# Altium PCB Board2.PcbDoc
Units mm, origin at the board's own origin, x right, y up, seen from the top; angles counter-clockwise.
Board outline 100 x 70 mm, 2 copper layers (Top Layer, Bottom Layer); 17 components, 29 nets, 158 pads, 148 vias.
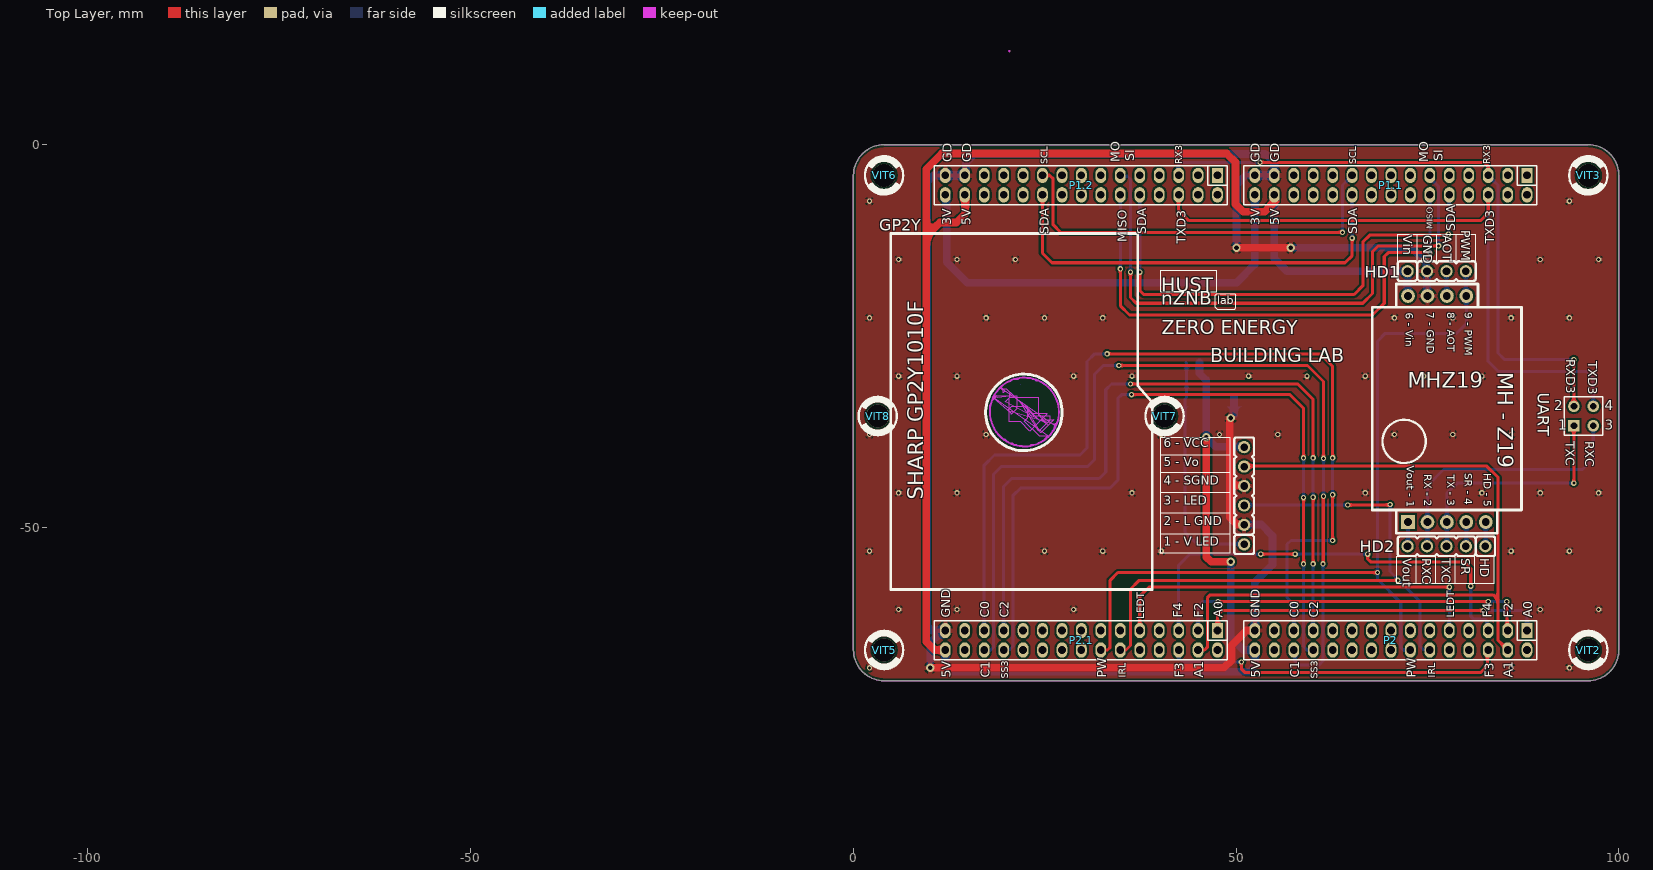
[diagram p0: Top Layer view]
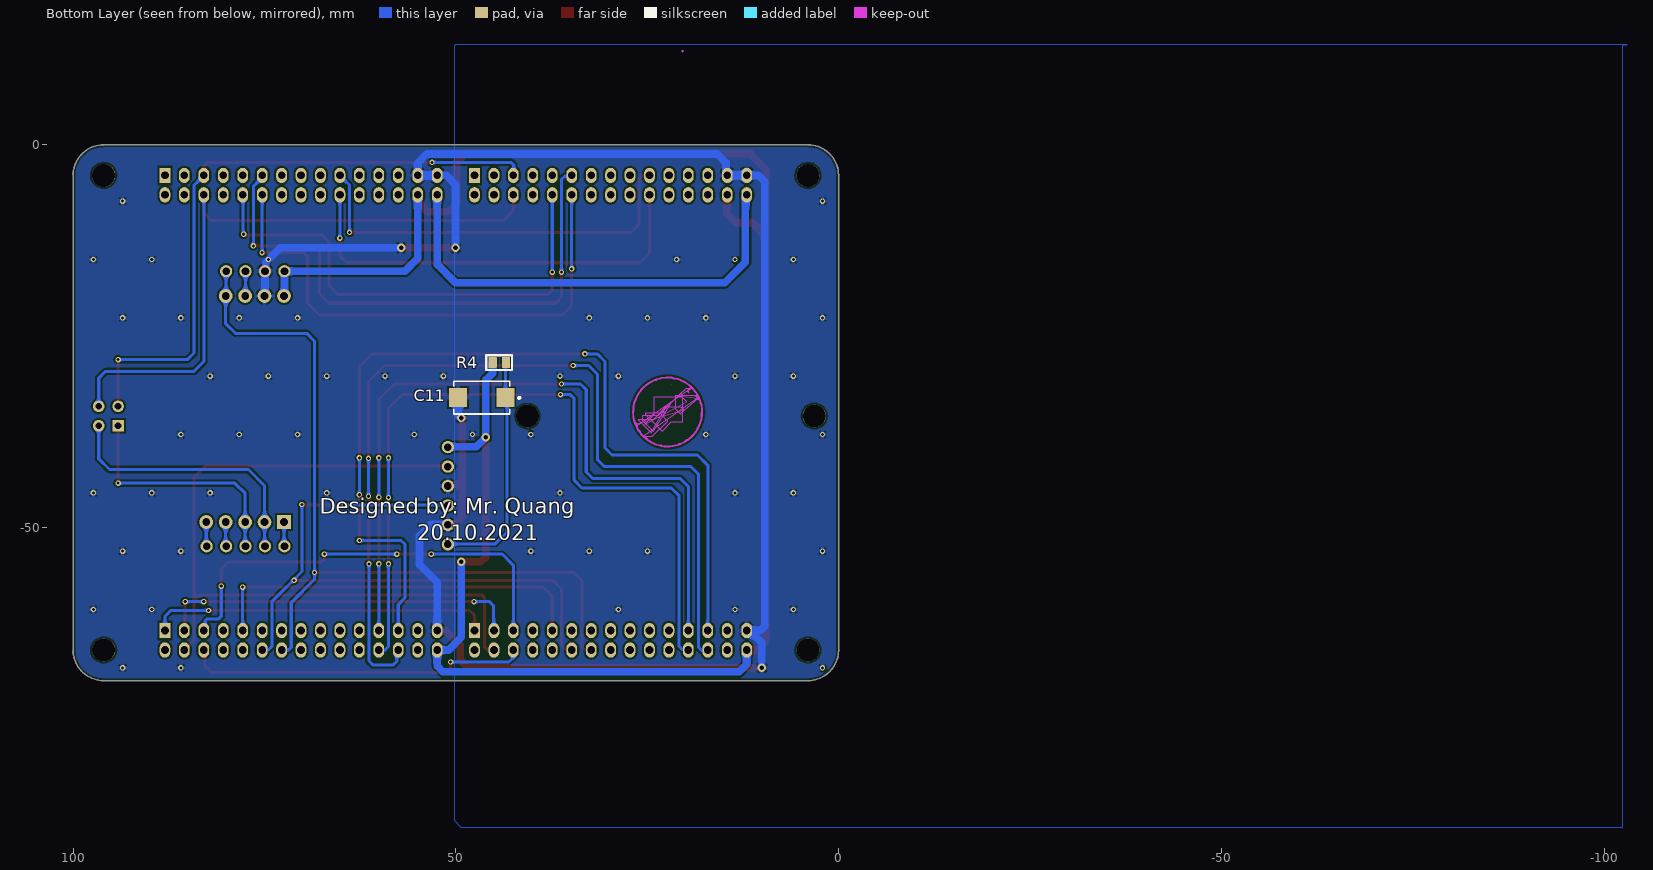
[diagram p1: Bottom Layer view, seen from below]

## Layer stack, top to bottom
Top Solder: solder mask 0.0102, Solder Resist, Dk 3.5
Top Layer: signal copper 0.0356
Dielectric 1: dielectric 0.32, FR-4, Dk 4.8
Bottom Layer: signal copper 0.0356
Bottom Solder: solder mask 0.0102, Solder Resist, Dk 3.5

## Board outline
0,-66 0,-4 cw(c4,-4) 4,0 96,0 cw(c96,-4) 100,-4 100,-66 cw(c96,-66) 96,-70 4,-70 cw(c4,-66)

## Design rules (kind name [scope] priority, off if disabled: settings)
Clearance [All] p1: gap=0.254 ignorepadtopadclearanceinfootprint=FALSE
PlaneConnect [All] p1: planeconnectstyle=Relief reliefexpansion=0.508 reliefentries=4 reliefconductorwidth=0.6 reliefairgap=0.4
PolygonConnect [All] p1: connectstyle=Relief reliefconductorwidth=0.6 reliefentries=4 polygonreliefangle="90 Angle" airgapwidth=0.254
RoutingVias RoutingVias_power [InNetClass('Power_class')] p1: holewidth=0.6 width=1.1 viastyle="Through Hole" minholewidth=0.6 minwidth=1.1 maxholewidth=0.6 maxwidth=1.1
RoutingVias RoutingVias_signal [All] p2: holewidth=0.4 width=0.7 viastyle="Through Hole" minholewidth=0.4 minwidth=0.7 maxholewidth=0.4 maxwidth=0.7
SolderMaskExpansion [All] p1: expansion=0.102
UnRoutedNet [All] p1: checkbadconnections=TRUE
Width Width_Power [InNetClass('Power_class')] p1: maxlimit=2 minlimit=1 preferedwidth=1
Width Width_Signal [All] p2: maxlimit=0.4 minlimit=0.4 preferedwidth=0.4
28 further rules are at their usual default settings.

## Classes and differential pairs
net class Power_class: 3.3V 5V GND
component class BOARD2: C11 GP2Y HD1 HD2 MHZ19 P1.1 P1.2 P2.1 R4 UART VIT2 VIT3 VIT5 VIT6 VIT7 VIT8

## Components (designator, comment, footprint, x,y, rotation, side; value= is the part's Value field where it differs from the comment)
C11 "220uF/16V" CAPMP7343X430N 46.609,-33.02 r0 bottom value=1000uF/16V
GP2Y "GP2Y1010Au0f" GP2Y1010AU0F 51.038,-52.197 r0 top
HD1 "Header 4" Header_4 76.2,-16.51 r0 top
HD2 "HD5" Header_5 77.47,-52.451 r180 top
MHZ19 "MH-Z19" MH-Z19 72.443,-19.746 r270 top
P1.1 "Header 15X2H" HED15X2H 88,-4 r180 top
P1.2 "Header 15X2H" HED15X2H 47.56,-4 r180 top
P2 "Header 15X2H" HED15X2H 88,-63.46 r180 top
P2.1 "Header 15X2H" HED15X2H 47.56,-63.46 r180 top
R4 "150R" "Res 0805 SMD" 44.323,-28.448 r180 bottom
UART "Jumper 2x2" HDR2X2 94.107,-36.703 r0 top value="JP 2x2" (schematic designator J?)
VIT2 "1" "Screw 3 small" 96,-66 r0 top
VIT3 "1" "Screw 3 small" 96,-4 r0 top
VIT5 "1" "Screw 3 small" 4,-66 r0 top
VIT6 "1" "Screw 3 small" 4,-4 r0 top
VIT7 "1" "Screw 3 small" 40.64,-35.433 r0 top
VIT8 "1" "Screw 3 small" 3.175,-35.433 r0 top

## Footprints (in the part's own frame and the unit in brackets; to place one, negate y for a bottom-side part, rotate by r counter-clockwise, add the part's x,y. Pads: shape width x height; smd on the part's side, far side on the other; paste and mask are expansions set on the pad)
CAPMP7343X430N [mm]
  rect 2.35x2.45 smd: 1(-3.1,0) 2(3.1,0)
  silkscreen extent -5.11,-2.15 3.65,2.15, body extent -3.75,-2.35 3.55,1.95, height 2.2
GP2Y1010AU0F [mm] "dust sensor 2.5 pm"
  round 1.6 hole 1 mask+0.1: 1(0,0) 2(0,2.54) 3(0,5.08) 4(0,7.62) 5(0,10.16) 6(0,12.7)
  Keep-Out Layer circle w0.254: c-28.704,17.288 r4.5
  Keep-Out Layer region: -29.212,20.844
  Keep-Out Layer region: -31.9,20.5 -31.7,20.5 -30.9,21.3 -30.5,21.3 -30.2,21.6 -29.5,21.6 -29.3,21.8 -28.5,21.8 -28.4,21.7 -27.8,21.7 -27.7,21.6 -27.4,21.6 -27.2,21.4 -26.8,21.4 -26.6,21.2 -26.5,21.2 -26.2,20.9 -26,20.9 -25.4,20.3 -25.4,20.3 -25,19.9 -25,19.8 -24.8,19.6 -24.8,19.4 -24.6,19.2 -24.6,19 -24.5,18.9 -24.5,18.7 -24.4,18.6 -24.4,18.5 -24.3,18.4 -24.3,17.384 -24.2,17.284 -24.2,16.4 -24.4,16.2 -24.4,15.9 -24.7,15.6 -24.7,15.5 -24.6,15.6 -24.6,15.4
  Keep-Out Layer region: -24.6,15.4
  Keep-Out Layer region: -24.7,15.8 -24.7,15.6 -24.6,15.5 -24.6,15.3 -24.9,15
  Keep-Out Layer region: -24.65,15.55 -24.7,15.6 -24.7,15.8 -24.6,15.8 -24.55,15.75
  Keep-Out Layer region: -25.5,14.1 -25.7,14.1 -26.5,13.3 -26.9,13.3 -27.2,13 -27.9,13 -28.1,12.8 -28.9,12.8 -29,12.9 -29.6,12.9 -29.7,13 -30,13 -30.2,13.2 -30.6,13.2 -30.8,13.4 -30.9,13.4 -31.2,13.7 -31.4,13.7 -32,14.3 -32,14.3 -32.4,14.7 -32.4,14.8 -32.6,15 -32.6,15.2 -32.8,15.4 -32.8,15.6 -32.9,15.7 -32.9,15.9 -33,16 -33,16.1 -33.1,16.2 -33.1,17.216 -33.2,17.316 -33.2,18.2 -33,18.4 -33,18.7 -32.7,19 -32.7,19.1 -32.8,19 -32.8,19.2
  Keep-Out Layer region: -32.85,18.85 -32.85,19.25 -32.6,19.5 -32.5,19.4 -32.3,19.4
  Keep-Out Layer region: -32.2,20 -32.2,20.2 -31.9,20.5 -31.6,20.2 -31.4,20.2 -31.7,20.5 -32.6,19.6
  Keep-Out Layer region: -32.7,19.1 -32.7,19.5 -31.7,20.5 -31.7,20.4 -31.3,20 -31.2,20 -31.55,20.35 -31.05,20.35 -30.1,19.4
  Keep-Out Layer region: -31.55,20.35 -31.2,20 -31.3,20 -31.5,19.8
  Keep-Out Layer region: -24.7,15.7 -24.75,15.65 -24.75,15.15 -25.1,14.8 -25.1,14.5 -25.2,14.5 -25.6,14.1 -26.7,14.1 -28.7,16.1 -28.25,16.55 -28.25,17.95 -30.45,17.95 -30.9,17.5
  Keep-Out Layer region: -28.6,18.1 -26.8,16.3 -24.9,16.3 -26.6,14.6
  Keep-Out Layer region: -29.2,18.5 -27.5,16.8 -25.4,16.8 -25.4,16.2 -26.8,14.8
  Keep-Out Layer region: -32.7,19.1 -32.4,19.4 -29.7,19.4 -29.7,17.7 -30.4,17 -30.4,17.1
  Keep-Out Layer region: -30.575,19.875 -27.8,17.1 -25.8,17.1 -25.8,17 -28,14.8 -29.2,16 -30.7,16 -30.7,18.8
  Keep-Out Layer region: -31.2,18.6 -30.6,19.2 -26.9,19.2 -26.9,16.9 -25.7,15.7
  silkscreen extent -46.18,-5.89 1.28,40.61, body extent -45.95,-5.69 1.27,40.31, height 18.3
HDR2X2 [mm] "Connector; Header; 2x2 Position"
  rect 1.5x1.5 hole 0.9: 1(0,0)
  round 1.5 hole 0.9: 2(0,2.54) 3(2.54,0) 4(2.54,2.54)
  silkscreen extent -1.27,-1.27 3.81,3.81, body extent -1.27,-1.27 3.81,3.81, height 7
Header_4 [mm] "Connector DIP, 4Pin_2.54mm"
  round 1.6 hole 1 mask+0.1: 1(-3.81,0) 2(-1.27,0) 3(1.27,0) 4(3.81,0)
  silkscreen extent -5.08,-1.28 5.08,1.28, body extent -5.08,-1.27 5.08,1.27, height 10.1
Header_5 [mm] "Connector DIP, 5Pin_2.54mm"
  round 1.6 hole 1 mask+0.1: 1(-5.08,0) 2(-2.54,0) 3(0,0) 4(2.54,0) 5(5.08,0)
  silkscreen extent -6.35,-1.28 6.35,1.28, body extent -6.35,-1.27 6.35,1.27, height 10.1
HED15X2H [mm]
  rect 1.4x2 hole 1: 1(0,0)
  oval 1.4x2 hole 1: 2(0,2.54) 3(2.54,0) 4(2.54,2.54) 5(5.08,0) 6(5.08,2.54) 7(7.62,0) 8(7.62,2.54) 9(10.16,0) 10(10.16,2.54) 11(12.7,0) 12(12.7,2.54) 13(15.24,0) 14(15.24,2.54) 15(17.78,0) 16(17.78,2.54) 17(20.32,0) 18(20.32,2.54) 19(22.86,0) 20(22.86,2.54) 21(25.4,0) 22(25.4,2.54) 23(27.94,0) 24(27.94,2.54) 25(30.48,0) 26(30.48,2.54) 27(33.02,0) 28(33.02,2.54) 29(35.56,0) 30(35.56,2.54)
  silkscreen extent -1.27,-1.27 37,3.81, body extent -1.27,-1.27 36.83,3.81, height 10.1
MH-Z19 [mm] "co2 sensor"
  rect 1.8x1.8 hole 1 mask+0.2: 1(29.54,0)
  round 1.8 hole 1 mask+0.2: 2(29.54,2.54) 3(29.54,5.08) 4(29.54,7.62) 5(29.54,10.16) 6(0,0) 7(0,2.54) 8(0,5.08) 9(0,7.62)
  silkscreen extent -1.56,-4.67 31.01,14.83, body extent -1.37,-5.5 31.28,14.25, height 13
"Res 0805 SMD" [mm] "Reflow Soldering"
  rrect10% 1.1x1.4 smd mask+0.1: 1(-0.875,0) 2(0.875,0)
  silkscreen extent -1.69,-0.97 1.67,0.96, body extent -1,-0.63 1,0.62, height 0.62
"Screw 3 small" [mm] "Hole 3mm, outline 5mm"
  round 3 hole 3 mask+0.1: 1(0,0)
  silkscreen extent -2.5,-2.5 2.5,2.5, body extent -2.5,-2.5 2.5,2.5, height 1.73

## Part data
C11: library part CP4, "Cap 1000uF/16V - 220uF/50V", Description 1="2200uF-3300uF/6,3V - 1000uF-2200uF/10V", Description 2="1000uF/16V - 470uF => 1000uF/25V - 100uF/100V", Description 3=330uF>470uF/35V_220uF>470uF/50V_10uF>22uF/250V, Description 4="220uF => 330uF/63V - 10uF =>33uF/160 - 200V", Description 5="4,7uF>10uF/250V_3,3uF>10uF/400V - 2,2uF>4,7uF/450V"
GP2Y: "dust sensor 2.5"
HD1: library part Header4
HD2: library part Header5, "Header 5", Creat by=VanDungEvn@Gmail.com
MHZ19: "Co2 sensor"
P1.1 P1.2 P2 P2.1: "Header, 15-Pin, Dual row, Right Angle", LatestRevisionDate=17-Jul-2002, LatestRevisionNote="Re-released for DXP Platform.", Publisher="Altium Limited"
R4: library part RM, "Resistor SMD"
UART: library part JP2x2
VIT2 VIT3 VIT5 VIT6 VIT7 VIT8: library part VIT, "Oc Vit"

## Via types
v1: diameter 0.7, hole 0.4, Top Layer to Bottom Layer, 142 vias
v2: diameter 1.1, hole 0.6, Top Layer to Bottom Layer, 6 vias

## Nets (pads, with @x,y where several pads share a name; then routed paths per layer and width w, separated by ;. In a path a pad name is that pad's centre, name@x,y a point inside that pad or via, vN(x,y) a via of type N, cw(c..) or ccw(c..) an arc to the next point about the centre after c; other vN are vias at no path point)
3.3V: P1.1.30 P1.2.30 | length 60.3
  Bottom Layer w1: P1.2.30@12.17,-6.54 12.17,-15.345 14.859,-18.034 50.038,-18.034 52.44,-15.632 P1.1.30
5V: GP2Y.6 HD1.1 MHZ19.6 P1.1.28 P1.2.28 P2.1.30 P2.30 R4.1 | length 250.8
  Top Layer w1: P2.1.30 10.628,-66 9.525,-64.897 9.525,-11.938 ; P1.2.28 14.617,-6.617 14.617,-8.983 13.44,-10.16 11.303,-10.16 9.525,-11.938 ; v2(46.101,-38.227) 46.101,-53.848 46.736,-54.483 v2(49.276,-54.483) ; P1.1.28 54.98,-7.504 53.721,-8.763 50.927,-8.763 49.911,-7.747 49.911,-2.286 48.768,-1.143 11.557,-1.143 9.525,-3.175 9.525,-11.938
  Bottom Layer w1: P2.1.30 12,-67.88 12.954,-68.834 51.689,-68.834 52.44,-68.083 P2.30 50.947,-66 49.276,-64.329 v2(49.276,-54.483) ; R4.1 45.198,-29.831 46.101,-30.734 v2(46.101,-38.227) 47.309,-39.435 GP2Y.6@51.132,-39.435 ; P1.1.28 54.98,-14.848 56.642,-16.51 HD1.1 72.39,-19.693 MHZ19.6
ADC0: P2.1 P2.1.1 | length 44.9
  Top Layer w0.4: P2.1.1 47.56,-61.477 48.204,-60.833 v1(82.296,-60.833)
  Bottom Layer w0.4: v1(82.296,-60.833) 87.249,-60.833 88,-61.584 P2.1
ADC1: GP2Y.5 P2.1.4 P2.4 | length 103
  Top Layer w0.4: P2.1.4 45.887,-66 46.228,-65.659 46.228,-59.182 46.609,-58.801 83.566,-58.801 84.201,-59.436 ; GP2Y.5@51.132,-41.975 82.742,-41.975 84.201,-43.434 84.201,-59.436 ; P2.4 84.201,-64.741 84.201,-59.436
GND: C11.2 GP2Y.2 GP2Y.4 HD1.2 MHZ19.7 P1.1.27 P1.1.29 P1.2.27 P1.2.29 P2.1.29 P2.29 | length 243.4
  Top Layer w1: v2(10.033,-68.326) 48.387,-68.326 49.403,-67.31 49.403,-65.356 51.299,-63.46 P2.29 ; v2(49.276,-35.687) 49.149,-35.814 49.149,-43.942 ; v2(50.038,-13.462) v2(57.15,-13.462) ; GP2Y.2@51.132,-49.595 50.103,-49.595 49.149,-48.641 49.149,-43.942 ; GP2Y.4@51.132,-44.515 49.976,-44.515 49.276,-43.815 49.149,-43.942
  Bottom Layer w1: v2(10.033,-68.326) 10.033,-65.024 P2.1.29@11.597,-63.46 ; P2.1.29 P2.1.29@11.597,-63.46 ; v2(49.276,-35.687) 49.709,-35.254 C11.2 ; v2(50.038,-13.462) 50.038,-5.207 51.245,-4 P1.1.29 P1.1.27 54.98,-2.402 53.771,-1.193 15.875,-1.193 14.71,-2.358 14.71,-4 12.17,-4 10.478,-4 9.652,-4.826 9.652,-62.865 10.247,-63.46 P2.1.29@11.597,-63.46 ; GP2Y.2@51.132,-49.595 53.278,-49.595 54.737,-51.054 54.737,-54.864 52.44,-57.161 P2.29 ; v2(57.15,-13.462) 72.909,-13.462 74.815,-15.368 74.815,-16.395 HD1.2 74.93,-19.693 MHZ19.7
  other v1: 2.092,-68.328 85.912,-68.328 85.912,-68.328 93.532,-68.328 93.532,-68.328 5.902,-60.708 5.902,-60.708 13.522,-60.708 13.522,-60.708 28.762,-60.708 28.762,-60.708 89.722,-60.708 89.722,-60.708 97.342,-60.708 97.342,-60.708 2.092,-53.088 2.092,-53.088 24.952,-53.088 24.952,-53.088 32.572,-53.088 32.572,-53.088 40.192,-53.088 40.192,-53.088 85.912,-53.088 85.912,-53.088 93.532,-53.088 93.532,-53.088 5.902,-45.468 5.902,-45.468 13.522,-45.468 13.522,-45.468 36.382,-45.468 36.382,-45.468 66.862,-45.468 66.862,-45.468 82.102,-45.468 82.102,-45.468 89.722,-45.468 89.722,-45.468 97.342,-45.468 97.342,-45.468 2.092,-37.848 2.092,-37.848 17.332,-37.848 17.332,-37.848 40.192,-37.848 47.812,-37.848 47.812,-37.848 55.432,-37.848 55.432,-37.848 70.672,-37.848 70.672,-37.848 78.292,-37.848 78.292,-37.848 85.912,-37.848 85.912,-37.848 5.902,-30.228 5.902,-30.228 13.522,-30.228 13.522,-30.228 28.762,-30.228 28.762,-30.228 36.382,-30.228 51.622,-30.228 59.242,-30.228 66.862,-30.228 66.862,-30.228 74.482,-30.228 74.482,-30.228 82.102,-30.228 82.102,-30.228 2.092,-22.608 2.092,-22.608 17.332,-22.608 17.332,-22.608 24.952,-22.608 24.952,-22.608 32.572,-22.608 32.572,-22.608 70.672,-22.608 70.672,-22.608 78.292,-22.608 78.292,-22.608 85.912,-22.608 85.912,-22.608 93.532,-22.608 93.532,-22.608 5.902,-14.988 5.902,-14.988 13.522,-14.988 21.142,-14.988 21.142,-14.988 74.482,-14.988 89.722,-14.988 89.722,-14.988 97.342,-14.988 97.342,-14.988 2.092,-7.368 2.092,-7.368 93.532,-7.368 93.532,-7.368
IR-LED: GP2Y.3 P2.1.12 P2.12 | length 85
  Top Layer w0.4: P2.1.12 35.6,-66 36.195,-65.405 36.195,-58.039 37.211,-57.023 37.338,-56.896 v1(71.12,-56.896) ; v1(64.578,-47.055) 70.039,-47.055 v1(70.104,-46.99)
  Bottom Layer w0.4: GP2Y.3@51.132,-47.055 v1(64.578,-47.055) ; v1(70.104,-46.99) 70.104,-55.753 74.041,-59.69 74.041,-65.532 74.509,-66 P2.12
LED-TCS: P2.1.9 P2.9 | length 51.1
  Top Layer w0.4: P2.1.9 37.4,-58.993 38.608,-57.785 v1(77.851,-57.785)
  Bottom Layer w0.4: P2.9 77.84,-57.796 v1(77.851,-57.785)
MISO: P1.1.12 P1.2.12 | length 69.9
  Top Layer w0.4: v1(34.86,-16.213) 34.86,-21.017 36.068,-22.225 67.818,-22.225 69.342,-20.701 69.342,-14.605 69.85,-14.097 v1(75.311,-14.097)
  Bottom Layer w0.4: v1(34.86,-16.213) P1.2.12 ; P1.1.12 75.3,-14.086 v1(75.311,-14.097)
MOSI: P1.1.11 P1.2.11 | length 73.5
  Top Layer w0.4: v1(36.195,-16.637) 36.195,-19.939 36.957,-20.701 66.548,-20.701 67.818,-19.431 67.818,-13.97 68.58,-13.208 v1(76.454,-13.208)
  Bottom Layer w0.4: P1.2.11 34.99,-4.13 35.814,-4.13 36.195,-4.511 v1(36.195,-16.637) ; P1.1.11 75.3,-4.3 76.454,-5.454 v1(76.454,-13.208)
NetC11_1: C11.1 GP2Y.1 R4.2 | length 30.7
  Bottom Layer w0.4: R4.2 43.509,-28.509 C11.1 43.307,-33.222 43.307,-50.611 44.831,-52.135 GP2Y.1@51.132,-52.135
NetHD1_3: HD1.3 MHZ19.8 | length 3.3
  Bottom Layer w0.4: HD1.3 77.47,-19.693 MHZ19.8
NetHD2_1: HD2.1 MHZ19.5 | length 3.2
  Bottom Layer w0.4: HD2.1 82.603,-52.398 MHZ19.5
NetHD2_2: HD2.2 MHZ19.4 | length 3.2
  Bottom Layer w0.4: HD2.2 80.063,-52.398 MHZ19.4
NetHD2_5: HD2.5 MHZ19.1 | length 3.2
  Bottom Layer w0.4: HD2.5 72.443,-52.398 MHZ19.1
PC0: P2.1.25 P2.25 | length 121
  Top Layer w0.4: v1(33.147,-27.305) 60.96,-27.305 62.611,-28.956 62.611,-40.883 v1(62.6,-40.894) ; v1(62.6,-45.72) 62.605,-45.726 62.605,-51.683 v1(62.611,-51.689)
  Bottom Layer w0.4: P2.1.25 17.08,-41.848 18.415,-40.513 29.591,-40.513 30.519,-39.585 30.519,-28.321 31.535,-27.305 v1(33.147,-27.305) ; P2.25 57.52,-60.071 56.642,-59.193 56.642,-52.197 57.15,-51.689 v1(62.611,-51.689) ; v1(62.6,-45.72) v1(62.6,-40.894)
PC1: P2.1.26 P2.26 | length 122.5
  Top Layer w0.4: v1(34.671,-28.829) 59.309,-28.829 61.404,-30.924 v1(61.404,-40.957) ; v1(61.341,-54.737) 61.373,-54.705 61.373,-45.942 v1(61.404,-45.91)
  Bottom Layer w0.4: P2.1.26 17.12,-66.04 17.907,-66.04 18.288,-65.659 18.288,-43.053 19.304,-42.037 30.607,-42.037 31.496,-41.148 31.496,-29.972 32.639,-28.829 v1(34.671,-28.829) ; P2.26 57.711,-66.191 57.711,-67.49 58.166,-67.945 60.833,-67.945 61.341,-67.437 v1(61.341,-54.737) ; v1(61.404,-45.91) v1(61.404,-40.957)
PC2: P2.1.23 P2.23 | length 102.1
  Top Layer w0.4: v1(36.195,-31.242) 58.039,-31.242 60.06,-33.263 v1(60.06,-40.905) ; v1(60.06,-54.737) v1(60.06,-46.044)
  Bottom Layer w0.4: P2.1.23 19.62,-44.642 20.669,-43.593 32.099,-43.593 32.956,-42.735 32.956,-32.004 33.718,-31.242 v1(36.195,-31.242) ; P2.23 v1(60.06,-54.737) ; v1(60.06,-46.044) v1(60.06,-40.905)
PF2: P2.1.3 P2.3 | length 47.6
  Top Layer w0.4: v1(47.625,-59.69) v1(82.931,-59.69) ; v1(85.344,-59.69) 85.401,-59.747 85.401,-63.402 P2.3
  Bottom Layer w0.4: P2.1.3 45.047,-63.433 45.047,-61.86 45.085,-61.822 45.085,-60.198 45.593,-59.69 v1(47.625,-59.69) ; v1(82.931,-59.69) v1(85.344,-59.69)
PF3: P2.1.6 P2.6 | length 45.2
  Top Layer w0.4: v1(50.673,-67.564) 50.673,-68.453 51.181,-68.961 81.915,-68.961 82.804,-68.072 82.804,-66.116 P2.6
  Bottom Layer w0.4: P2.1.6 42.418,-66.062 42.418,-66.949 42.652,-67.183 42.672,-67.183 43.053,-67.564 v1(50.673,-67.564)
PF4: P2.1.5 P2.5 | length 58.4
  Top Layer w0.4: v1(53.213,-53.467) v1(57.711,-53.467) ; v1(67.183,-53.467) 67.183,-54.102 67.564,-54.483 79.756,-54.483 80.645,-55.372 v1(80.645,-57.658)
  Bottom Layer w0.4: P2.1.5 42.48,-54.929 43.942,-53.467 v1(53.213,-53.467) ; v1(57.711,-53.467) v1(67.183,-53.467) ; v1(80.645,-57.658) 80.645,-61.595 81.026,-61.976 82.55,-61.976 82.728,-62.154 82.728,-63.269 P2.5
PWM: HD1.4 MHZ19.9 P2.1.14 P2.14 | length 107.6
  Top Layer w0.4: P2.1.14 33.187,-66 33.528,-65.659 33.528,-56.896 34.544,-55.88 v1(68.453,-55.88)
  Bottom Layer w0.4: P2.14 71.842,-66 71.501,-65.659 71.501,-59.817 68.453,-56.769 v1(68.453,-55.88) 68.453,-25.654 69.469,-24.638 78.793,-24.638 80.063,-23.368 MHZ19.9 80.01,-19.693 HD1.4
RXC: HD2.4 MHZ19.2 UART.3 | length 35.4
  Bottom Layer w0.4: HD2.4 74.983,-52.398 MHZ19.2 74.983,-44.524 77.089,-42.418 95.25,-42.418 96.647,-41.021 UART.3
RXD3: P1.1.5 P1.2.5 UART.2 | length 83.5
  Top Layer w0.4: v1(53.108,-2.297) 53.119,-2.286 82.423,-2.286 82.92,-2.783 P1.1.5 ; UART.2 v1(94.107,-28.067)
  Bottom Layer w0.4: P1.2.5 42.418,-3.938 42.418,-2.667 42.788,-2.297 v1(53.108,-2.297) ; P1.1.5 84.201,-5.281 84.201,-27.203 85.065,-28.067 v1(94.107,-28.067)
SCK: P1.1.10 P1.2.10 | length 64.8
  Top Layer w0.4: v1(37.4,-16.637) 37.4,-19.046 37.912,-19.558 65.405,-19.558 66.548,-18.415 66.548,-12.7 67.437,-11.811 77.597,-11.811 v1(77.724,-11.684)
  Bottom Layer w0.4: v1(37.4,-16.637) P1.2.10 ; v1(77.724,-11.684) 77.781,-11.627 77.781,-6.598 P1.1.10
SCL: P1.1.19 P1.2.19 | length 53.7
  Top Layer w0.4: P1.2.19 25.654,-4 26.086,-4.432 26.086,-10.465 27.051,-11.43 v1(63.881,-11.43)
  Bottom Layer w0.4: v1(63.881,-11.43) 63.881,-5.259 P1.1.19
SDA: P1.1.20 P1.2.20 | length 56.9
  Top Layer w0.4: P1.2.20 24.7,-14.159 25.95,-15.409 64.22,-15.409 65.151,-14.478 v1(65.151,-12.192)
  Bottom Layer w0.4: P1.1.20 65.145,-6.546 65.145,-12.186 v1(65.151,-12.192)
SS3: P2.1.24 P2.24 | length 104.1
  Top Layer w0.4: v1(36.322,-32.639) 57.023,-32.639 58.801,-34.417 v1(58.801,-40.894) ; v1(58.801,-54.737) v1(58.801,-46.101)
  Bottom Layer w0.4: P2.1.24 19.707,-65.913 20.447,-65.913 20.828,-65.532 20.828,-45.847 21.844,-44.831 33.528,-44.831 34.544,-43.815 34.544,-33.147 35.052,-32.639 v1(36.322,-32.639) ; v1(58.801,-54.737) 58.801,-65.552 59.289,-66.04 60.02,-66.04 P2.24 ; v1(58.801,-46.101) v1(58.801,-40.894)
TXC: HD2.3 MHZ19.3 UART.1 | length 31.6
  Top Layer w0.4: v1(94.107,-44.196) UART.1
  Bottom Layer w0.4: HD2.3 77.523,-52.398 MHZ19.3 77.523,-45.54 78.867,-44.196 v1(94.107,-44.196)
TXD3: P1.1.6 P1.2.6 UART.4 | length 85.9
  Top Layer w0.4: P1.2.6 42.48,-8.571 43.815,-9.906 81.915,-9.906 82.931,-8.89 82.931,-6.551 P1.1.6
  Bottom Layer w0.4: P1.1.6 82.92,-28.31 84.201,-29.591 95.758,-29.591 96.647,-30.48 UART.4
pads on no net: P1.1.1 P1.1.2 P1.1.3 P1.1.4 P1.1.7 P1.1.8 P1.1.9 P1.1.13 P1.1.14 P1.1.15 P1.1.16 P1.1.17 P1.1.18 P1.1.21 P1.1.22 P1.1.23 P1.1.24 P1.1.25 P1.1.26 P1.2.1 P1.2.2 P1.2.3 P1.2.4 P1.2.7 P1.2.8 P1.2.9 P1.2.13 P1.2.14 P1.2.15 P1.2.16 P1.2.17 P1.2.18 P1.2.21 P1.2.22 P1.2.23 P1.2.24 P1.2.25 P1.2.26 P2.1.2 P2.1.7 P2.1.8 P2.1.10 P2.1.11 P2.1.13 P2.1.15 P2.1.16 P2.1.17 P2.1.18 P2.1.19 P2.1.20 P2.1.21 P2.1.22 P2.1.27 P2.1.28 P2.2 P2.7 P2.8 P2.10 P2.11 P2.13 P2.15 P2.16 P2.17 P2.18 P2.19 P2.20 P2.21 P2.22 P2.27 P2.28 VIT2.1 VIT3.1 VIT5.1 VIT6.1 VIT7.1 VIT8.1

## Polygon pours and split planes (outlines as drawn)
GND on Bottom Layer "Top Poly" (solid, remove dead copper, pour order 55): 0,-3.683 0,-2.286 2.286,0 97.663,0 100,-2.337 100,-6.731 100,-67.64 97.64,-70 2.436,-70 0,-67.564 0,-2.667 0.508,-2.159
no net on Bottom Layer "Top Poly" (solid, remove dead copper, pour order 52): 1.042,-1.193
no net on Bottom Layer "Top Poly" (solid, remove dead copper, pour order 24): -99.762,122.68
no net on Bottom Layer "Top Poly" (solid, remove dead copper, pour order 22): -99.762,122.68
GND on Bottom Layer "Top Poly" (solid, remove dead copper, pour order 16): -99.127,8.888
GND on Bottom Layer "Top Poly" (solid, remove dead copper, pour order 14): -99.127,8.888
no net on Bottom Layer "Bottom Layer-No Net" (solid, shelved, pour order 10): -103.064,13.079 50.098,13.079 50.225,12.952 50.225,-88.267 49.336,-89.156 -102.429,-89.156 -102.429,13.079
GND on Top Layer "Top Poly" (solid, remove dead copper, pour order 53): 0,-3.556 0.127,-3.429 0.127,-2.551 0.508,-2.17 0.508,-2.032 0.762,-1.778 0.762,-1.651 1.524,-0.889 1.651,-0.889 2.159,-0.381 2.413,-0.381 2.54,-0.254 2.794,-0.254 2.921,-0.127 3.302,-0.127 3.429,0 97.028,0 97.536,-0.508 98.171,-0.508 99.695,-2.032 99.695,-2.794 100,-3.099 100,-67.64 97.663,-69.977 2.159,-69.977 0,-67.818 0,-2.921 0.254,-2.667

## Keep-outs
Keep-Out Layer:
  lines w0.15: 0,-66 ccw(c4,-66) 4,-70 96,-70 ccw(c96,-66) 100,-66 100,-4 ccw(c96,-4) 96,0 4,0 ccw(c4,-4) 0,-4 0,-66
  lines w0.3: 20.371,12.243 20.38,12.234

## Silkscreen, mask and mechanical layers (free items; w line width, h text height)
Top Overlay:
  lines w0.15: 71.12,-15.23 71.12,-11.684 81.28,-11.684 81.28,-15.24 ; 71.247,-53.721 70.993,-53.721 70.993,-57.277 83.693,-57.277 83.693,-53.721 ; 73.533,-57.277 73.533,-53.721 ; 73.66,-15.494 73.66,-11.684 ; 76.073,-57.277 76.073,-53.467 ; 76.2,-15.494 76.2,-11.684 ; 78.613,-57.277 78.613,-53.467 ; 78.74,-15.494 78.74,-11.684 ; 81.153,-57.277 81.153,-53.467 ; 40.144,-19.202 47.451,-19.202 47.451,-16.362 40.144,-16.362 40.144,-19.202 ; 47.294,-21.23 47.294,-19.631 47.439,-19.485 49.83,-19.485 49.975,-19.631 49.975,-21.315 49.804,-21.486 47.55,-21.486 47.294,-21.23
  text "SI" at 36.703,-2.17 h1.2 r90
  text "SI" at 76.973,-2.17 h1.2 r90
  text "GD" at 12.827,-2.297 h1.2 r90
  text "GD" at 15.367,-2.297 h1.2 r90
  text "MO" at 34.798,-2.297 h1.2 r90
  text "GD" at 53.097,-2.297 h1.2 r90
  text "GD" at 55.637,-2.297 h1.2 r90
  text "MO" at 75.068,-2.297 h1.2 r90
  text "SCL" at 25.4,-2.54 h0.9 r90
  text "RX3" at 42.926,-2.54 h0.9 r90
  text "SCL" at 65.67,-2.54 h0.9 r90
  text "RX3" at 83.196,-2.54 h0.9 r90
  text "3V" at 12.799,-10.501 h1.2 r90
  text "5V" at 15.339,-10.501 h1.2 r90
  text "3V" at 53.068,-10.501 h1.2 r90
  text "5V" at 55.608,-10.501 h1.2 r90
  text "MISO" at 75.692,-11.049 h0.8 r90
  text "PWM" at 79.375,-11.176 h1.2 r270
  text "SDA" at 78.613,-11.303 h1.2 r90
  text "SDA" at 25.527,-11.7 h1.2 r90
  text "SDA" at 38.227,-11.7 h1.2 r90
  text "SDA" at 65.797,-11.7 h1.2 r90
  text "Vin" at 71.808,-11.811 h1.2 r270
  text "GND" at 74.469,-11.811 h1.2 r270
  text "AOT" at 77.015,-11.811 h1.2 r270
  text "MISO" at 35.687,-12.7 h1.2 r90
  text "TXD3" at 43.434,-12.9 h1.2 r90
  text "TXD3" at 83.704,-12.9 h1.2 r90
  text "HUST" at 40.2,-19.202 h1.8
  text "lab" at 47.55,-21.23 h1.8
  text "nZNB" at 40.2,-21.483 h3
  text "ZERO ENERGY" at 40.258,-24.733 h1.8
  text "RXD3" at 93.091,-28.042 h1.2 r270
  text "TXD3" at 96.012,-28.296 h1.2 r270
  text "BUILDING LAB" at 46.609,-28.401 h1.8
  text "TXC" at 93.026,-38.71 h1.2 r270
  text "RXC" at 95.631,-38.71 h1.2 r270
  text "Vout" at 71.755,-54.041 h1.2 r270
  text "RXC" at 74.295,-54.041 h1.2 r270
  text "TXC" at 76.835,-54.041 h1.2 r270
  text "SR" at 79.375,-54.041 h1.2 r270
  text "HD" at 81.915,-54.041 h1.2 r270
  text "GND" at 12.657,-61.757 h1.2 r90
  text "C0" at 17.737,-61.757 h1.2 r90
  text "C2" at 20.277,-61.757 h1.2 r90
  text "F2" at 45.677,-61.757 h1.2 r90
  text "A0" at 48.217,-61.757 h1.2 r90
  text "GND" at 53.097,-61.757 h1.2 r90
  text "C0" at 58.177,-61.757 h1.2 r90
  text "C2" at 60.717,-61.757 h1.2 r90
  text "LEDT" at 78.497,-61.757 h1 r90
  text "F2" at 86.117,-61.757 h1.2 r90
  text "A0" at 88.657,-61.757 h1.2 r90
  text "F4" at 42.948,-61.797 h1.2 r90
  text "F4" at 83.388,-61.797 h1.2 r90
  text "LEDT" at 37.973,-61.976 h1 r90
  text "5V" at 12.7,-69.596 h1.2 r90
  text "C1" at 17.78,-69.596 h1.2 r90
  text "PW" at 33.02,-69.596 h1.2 r90
  text "IRL" at 35.56,-69.596 h0.9 r90
  text "F3" at 43.18,-69.596 h1.2 r90
  text "A1" at 45.72,-69.596 h1.2 r90
  text "5V" at 53.14,-69.596 h1.2 r90
  text "C1" at 58.22,-69.596 h1.2 r90
  text "PW" at 73.46,-69.596 h1.2 r90
  text "IRL" at 76,-69.596 h0.9 r90
  text "F3" at 83.62,-69.596 h1.2 r90
  text "A1" at 86.16,-69.596 h1.2 r90
  text "SS3" at 20.193,-69.723 h0.9 r90
  text "SS3" at 60.633,-69.723 h0.9 r90
Bottom Overlay:
  text "Designed by: Mr. Quang" at 67.765,-48.192 h2
  text "20.10.2021" at 55.065,-51.692 h2

## Text inside footprints (layer, text, board x,y; h text height)
GP2Y: Top Overlay "SHARP GP2Y1010F" at 9.138,-46.397 h2 r90; Top Overlay "1 - V LED" at 40.538,-52.747 h2; Top Overlay "2 - L GND" at 40.538,-50.097 h2; Top Overlay "3 - LED" at 40.538,-47.397 h2; Top Overlay "4 - SGND" at 40.538,-44.797 h2; Top Overlay "5 - Vo" at 40.538,-42.397 h2; Top Overlay "6 - VCC" at 40.538,-39.897 h2; Mechanical 1 "HD?" at 50.988,-45.797 h0.8 r90; Mechanical 1 "1" at 51.438,-52.447 h1 r90; Mechanical 1 "6" at 51.438,-39.747 h1 r90
HD1: Mechanical 2 "1" at 72.136,-16.764 h1.2; Mechanical 2 "4" at 79.756,-16.764 h1.2
HD2: Mechanical 2 "1" at 82.804,-52.197 h1.2 r180; Mechanical 2 "5" at 72.644,-52.197 h1.2 r180
MHZ19: Top Overlay "MH - Z19" at 84.143,-29.746 h2 r270; Top Overlay "Vout - 1" at 71.943,-41.946 h1.7 r270; Top Overlay "RX - 2" at 74.243,-43.011 h1.7 r270; Top Overlay "TX - 3" at 77.243,-43.083 h1.7 r270; Top Overlay "SR - 4" at 79.543,-42.923 h1.7 r270; Top Overlay "HD - 5" at 82.043,-42.912 h1.7 r270; Top Overlay "6 - Vin" at 71.843,-21.946 h1.7 r270; Top Overlay "7 - GND" at 74.543,-21.846 h1.7 r270; Top Overlay "8 - AOT" at 77.243,-21.846 h1.7 r270; Top Overlay "9 - PWM" at 79.543,-21.846 h1.7 r270
UART: Top Overlay "3" at 98.171,-37.211 h1.27; Top Overlay "4" at 98.171,-34.671 h1.27; Top Overlay "2" at 91.567,-34.671 h1.27; Top Overlay "1" at 92.075,-37.211 h1.27